# Altium PCB PCB2.PcbDoc
Units mil, origin at the board's own origin, x right, y up, seen from the top; angles counter-clockwise.
Board outline 5905.51 x 3937.01 mil, 2 copper layers (Top Layer, Bottom Layer); 96 components, 87 nets, 320 pads, 16 vias.
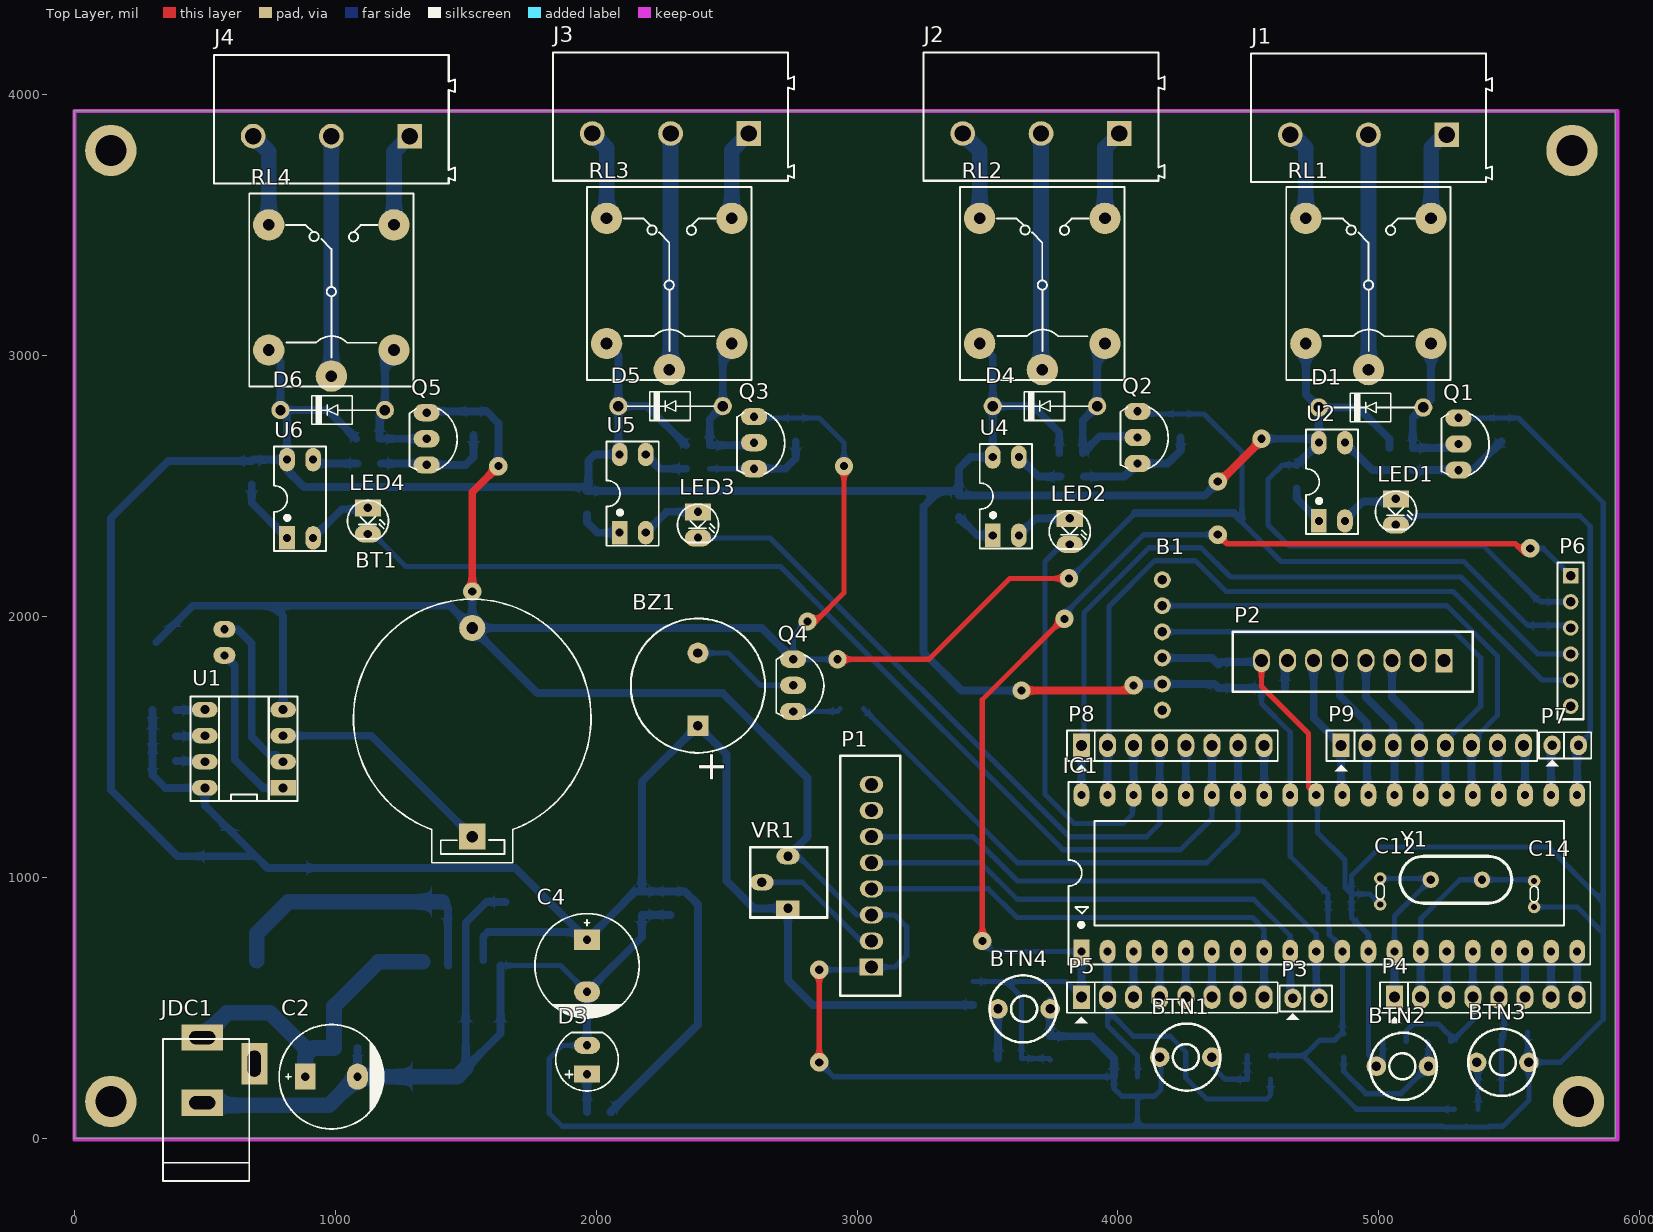
[diagram p0: Top Layer view]
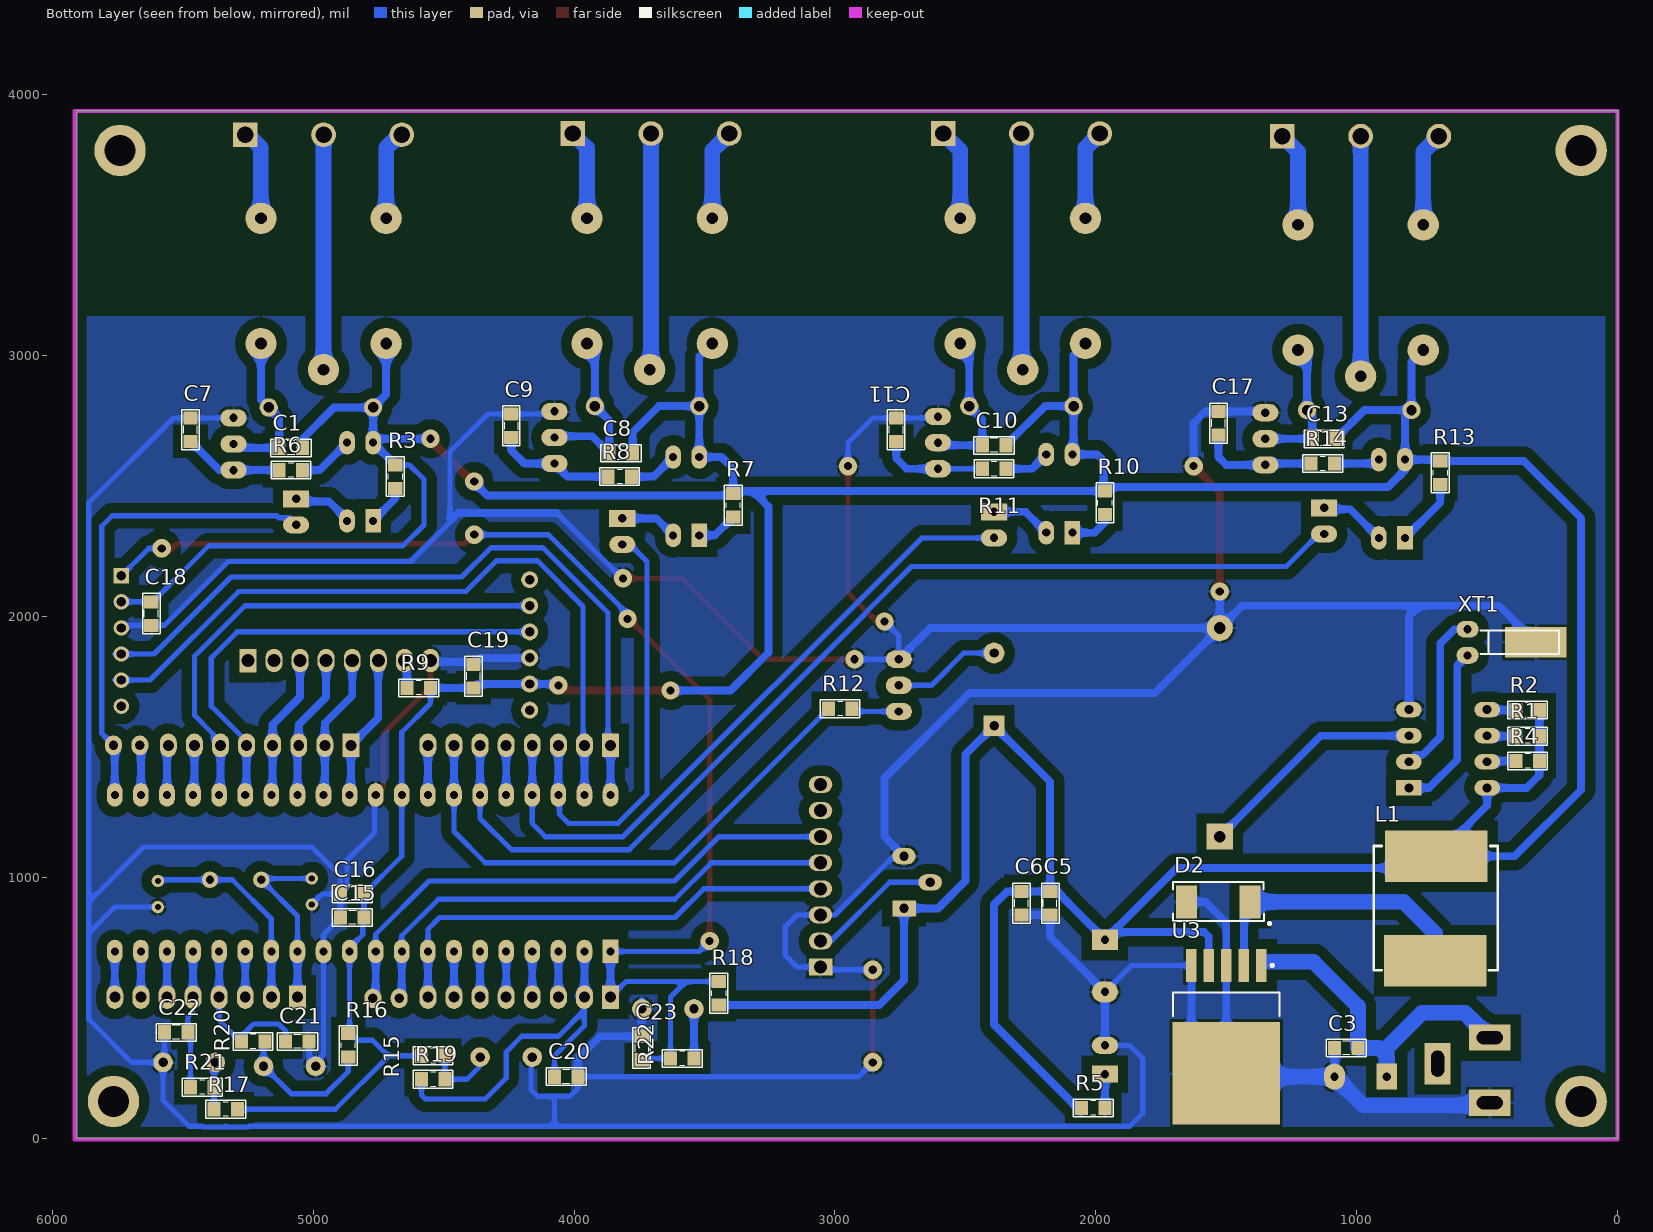
[diagram p1: Bottom Layer view, seen from below]
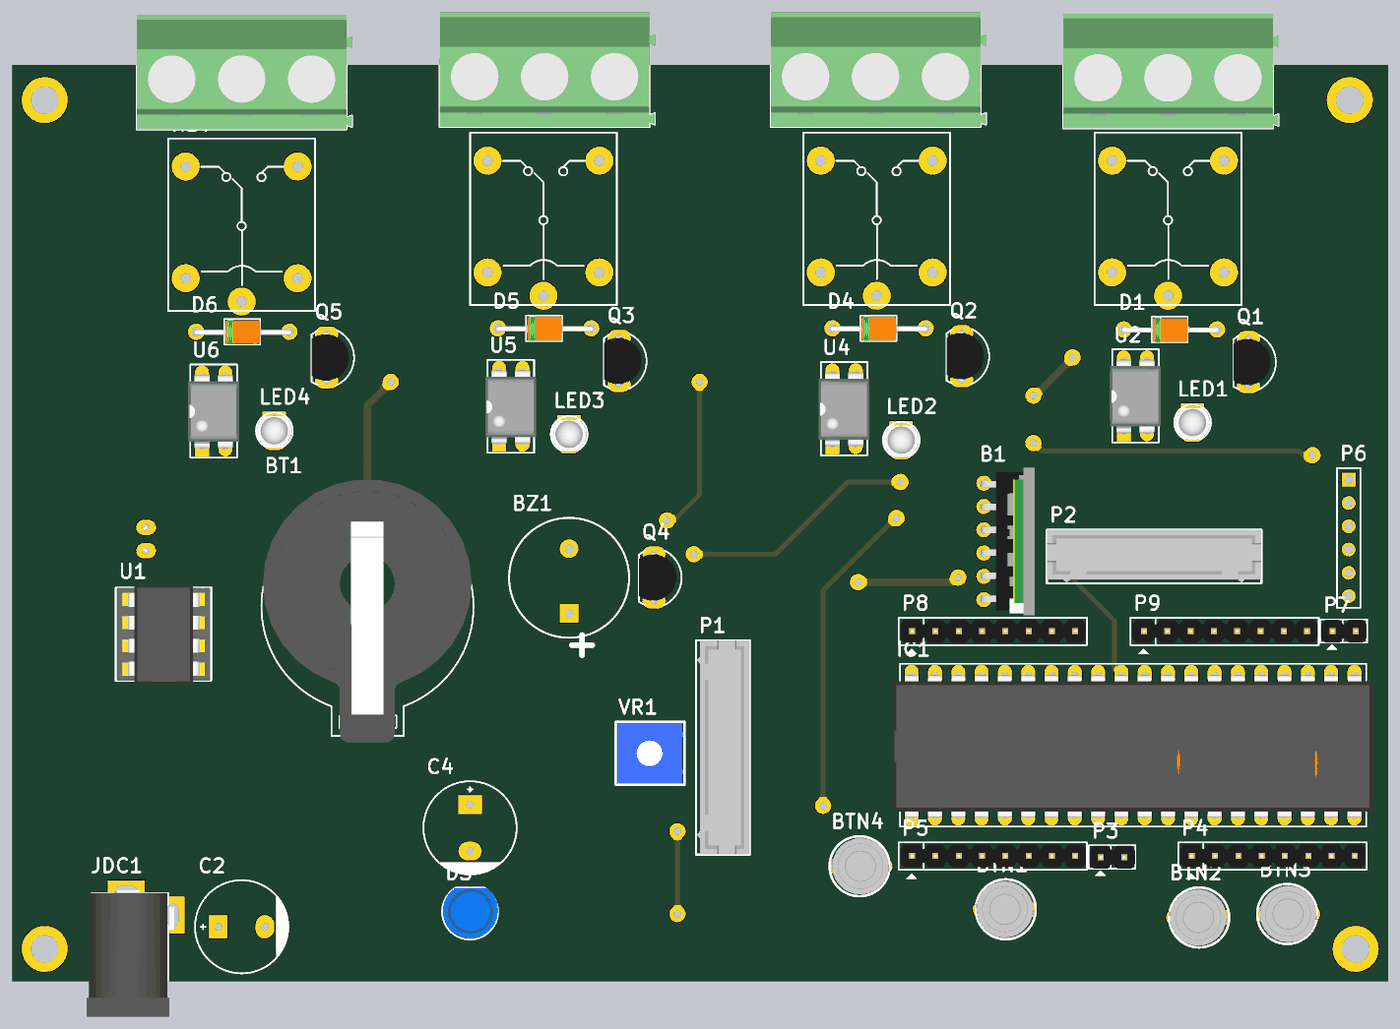
[diagram p2: 3D render of the assembled board from above, using the file's embedded part models]
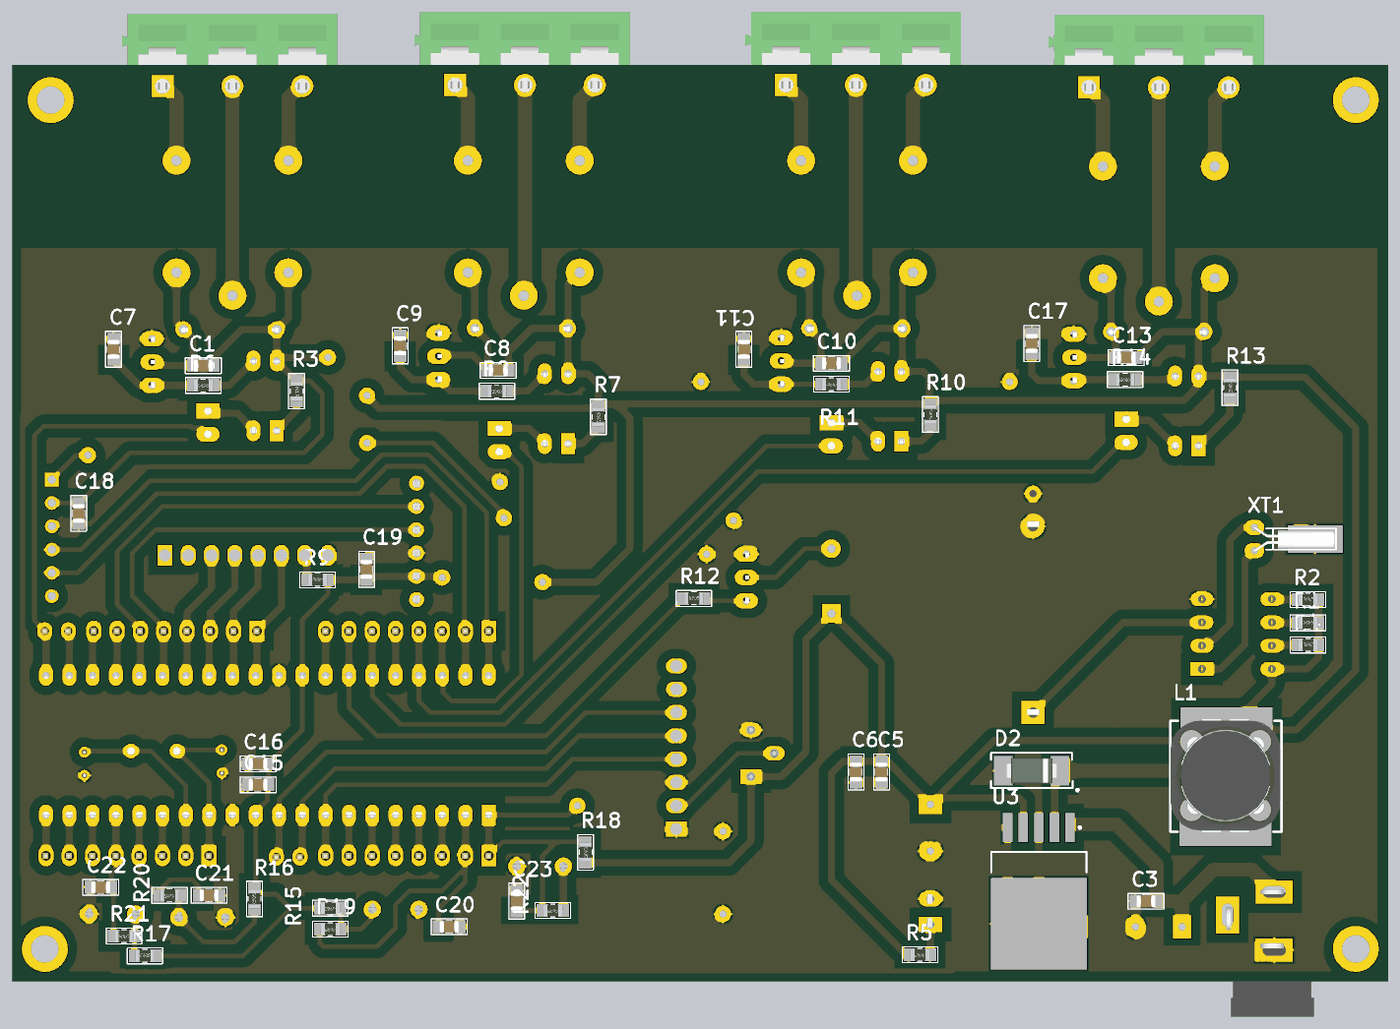
[diagram p3: 3D render of the assembled board from below, using the file's embedded part models]

## Layer stack, top to bottom
Top Solder: solder mask 0.4, Solder Resist, Dk 3.5
Top Layer: signal copper 1.4
Dielectric 1: dielectric 12.6, FR-4, Dk 4.8
Bottom Layer: signal copper 1.4
Bottom Solder: solder mask 0.4, Solder Resist, Dk 3.5

## Board outline
0,0 0,3937.01 5905.51,3937.01 5905.51,0

## Design rules (kind name [scope] priority, off if disabled: settings)
Clearance [All] p1: gap=40 ignorepadtopadclearanceinfootprint=FALSE
PlaneConnect [All] p1: planeconnectstyle=Direct reliefexpansion=20 reliefentries=4 reliefconductorwidth=10 reliefairgap=10
PolygonConnect [All] p1: connectstyle=Relief reliefconductorwidth=10 reliefentries=4 polygonreliefangle="90 Angle" airgapwidth=10
RoutingVias [All] p1: holewidth=31 width=70 viastyle="Through Hole" minholewidth=31 minwidth=70 maxholewidth=31 maxwidth=70
SolderMaskExpansion [All] p1: expansion=4
Width [All] p1: maxlimit=60 minlimit=20 preferedwidth=30
29 further rules are at their usual default settings.

## Components (designator, comment, footprint, x,y, rotation, side; value= is the part's Value field where it differs from the comment)
B1 "HC_05" HC_05 4170,2140 r270 top
BT1 "PIN 3V" PIN3V 1525,1155 r90 top
BTN1 "Button" Button 4260,305 r0 top
BTN2 "Button" Button 5090,270 r0 top
BTN3 "Button" Button 5475,295 r180 top
BTN4 "Button" Button 3640,500 r180 top
BZ1 "Buzzer" BUZZER 2390,1578.73 r90 top
C1 "Cap-10uF-50V-0805" CAP-SM-0805 5130,2645 r180 bottom value=0.1uF/50V
C2 "Cap Pol" CP2/4 885,235 r0 top value=680uF
C3 "Cap-100nF-50V-0805" CAP-SM-0805 1085,345 r180 bottom value=100nF/50V
C4 "Cap Pol" CP2/4 1965,760 r270 top value=220uF
C5 "Cap-100pF-50V-0805" CAP-SM-0805 2175,855 r90 bottom value=100pF/50V
C6 "Cap-100nF-50V-0805" CAP-SM-0805 2285,855 r90 bottom value=100nF/50V
C7 "Cap-10uF-50V-0805" CAP-SM-0805 5470,2760 r270 bottom value=0.1uF/50V
C8 "Cap-10uF-50V-0805" CAP-SM-0805 3865,2625 r180 bottom value=0.1uF/50V
C9 "Cap-10uF-50V-0805" CAP-SM-0805 4240,2775 r270 bottom value=0.1uF/50V
C10 "Cap-10uF-50V-0805" CAP-SM-0805 2435,2655 r180 bottom value=0.1uF/50V
C11 "Cap-10uF-50V-0805" CAP-SM-0805 2765,2760 r270 bottom value=0.1uF/50V
C12 "Capacitor Ceramic" Tu-pico 5005,895 r90 top value=33p
C13 "Cap-10uF-50V-0805" CAP-SM-0805 1170,2680 r180 bottom value=0.1uF/50V
C14 "Capacitor Ceramic" Tu-pico 5595,885 r90 top value=33p
C15 "Cap-10uF-50V-0805" CAP-SM-0805 4895,845 r180 bottom value=0.1uF/50V
C16 "Cap-10uF-50V-0805" CAP-SM-0805 4895,935 r180 bottom value=0.1uF/50V
C17 "Cap-10uF-50V-0805" CAP-SM-0805 1530,2785 r270 bottom value=0.1uF/50V
C18 "Cap-10uF-50V-0805" CAP-SM-0805 5620,1965 r90 bottom value=0.1uF/50V
C19 "Cap-10uF-50V-0805" CAP-SM-0805 4385,1725 r90 bottom value=0.1uF/50V
C20 "Cap-1nF-50V-0805" CAP-SM-0805 3985,235 r0 bottom value=1uF/50V
C21 "Cap-1nF-50V-0805" CAP-SM-0805 5015,370 r0 bottom value=1uF/50V
C22 "Cap-1nF-50V-0805" CAP-SM-0805 5570,405 r180 bottom value=1uF/50V
C23 "Cap-10uF-50V-0805" CAP-SM-0805 3740,390 r270 bottom value=1uF/50V
D1 "Diode" DIO-1A 5170,2800 r180 top value=1N5007
D2 "Diode-SS56" SS56 1530,905 r0 bottom value=SS56
D3 "LED" LED-5mm 1965,300 r90 top
D4 "Diode" DIO-1A 3920,2805 r180 top value=1N5007
D5 "Diode" DIO-1A 2485,2805 r180 top value=1N5007
D6 "Diode" DIO-1A 1190,2790 r180 top value=1N5007
IC1 "PIC 16F877A" DIP40/W0.6 3860,715 r0 top value=PIC16F877A
J1 "691218410003" 691218410003 4960,3909.96 r180 top
J2 "691218410003" 691218410003 3705,3914.96 r180 top
J3 "691218410003" 691218410003 2285,3914.96 r180 top
J4 "691218410003" 691218410003 985,3904.96 r180 top
JDC1 "Jack DC" DC-IN 590,260 r90 top value="Jac DC"
L1 "33uH" Inductor_SMD 458.78,1119.37 r0 bottom value="150 mH"
LED1 "LED" LED-3 5065,2450 r270 top value="LED 3 ly Single Colour"
LED2 "LED" LED-3 3815,2375 r270 top value="LED 3 ly Single Colour"
LED3 "LED" LED-3 2390,2400 r270 top value="LED 3 ly Single Colour"
LED4 "LED" LED-3 1125,2415 r270 top value="LED 3 ly Single Colour"
P1 "header 8p" "header 8p" 3051,652 r180 top
P2 "header 8p" "header 8p" 5253,1826 r270 top
P3 "Header 2" JP2 4670,535 r0 top
P4 "Header 8" JP8 5060,540 r0 top
P5 "Header 8" JP8 3860,540 r0 top
P6 "Header 6" HDR1X6 5735,2155 r270 top
P7 "Header 2" JP2 5664,1505 r0 top
P8 "Header 8" JP8 3860,1505 r0 top
P9 "Header 8" JP8 4855,1505 r0 top
Q1 "C1815" QTO-92 5305,2660 r270 top
Q2 "C1815" QTO-92 4075,2685 r270 top
Q3 "C1815" QTO-92 2605,2665 r270 top
Q4 "Transistor C1815" QTO-92 2755,1735 r270 top
Q5 "C1815" QTO-92 1350,2680 r270 top
R1 "Res-4.7K-0805" RES-SM-0805 390,1540 r180 bottom value=4.7K
R2 "Res-4.7K-0805" RES-SM-0805 390,1640 r180 bottom value=4.7K
R3 "Res-1K-0805" RES-SM-0805 4685,2580 r270 bottom value=1K
R4 "Res-4.7K-0805" RES-SM-0805 390,1445 r180 bottom value=4.7K
R5 "Res-1K-0805" RES-SM-0805 1965,115 r0 bottom value=10K
R6 "Res-1K-0805" RES-SM-0805 5040,2560 r0 bottom value=1K
R7 "Res-1K-0805" RES-SM-0805 3390,2470 r270 bottom value=1K
R8 "Res-1K-0805" RES-SM-0805 3780,2535 r0 bottom value=1K
R9 "Res-1K-0805" RES-SM-0805 4640,1725 r180 bottom value=1K
R10 "Res-1K-0805" RES-SM-0805 1965,2480 r270 bottom value=1K
R11 "Res-1K-0805" RES-SM-0805 2345,2565 r0 bottom value=1K
R12 "Res-15K-0805" RES-SM-0805 3025,1645 r180 bottom value=15K
R13 "Res-1K-0805" RES-SM-0805 680,2595 r270 bottom value=1K
R14 "Res-1K-0805" RES-SM-0805 1085,2585 r0 bottom value=1K
R15 "Res-10k-0805" RES-SM-0805 4495,315 r0 bottom value=10K
R16 "Res-10k-0805" RES-SM-0805 4865,310 r90 bottom value=10K
R17 "Res-10k-0805" RES-SM-0805 5380,110 r180 bottom value=10K
R18 "Res-10k-0805" RES-SM-0805 3445,600 r270 bottom value=10K
R19 "Res-1K-0805" RES-SM-0805 4495,225 r0 bottom value=1K
R20 "Res-1K-0805" RES-SM-0805 5185,370 r0 bottom value=1K
R21 "Res-1K-0805" RES-SM-0805 5380,195 r0 bottom value=1K
R22 "Res-1K-0805" RES-SM-0805 3540,305 r0 bottom value=1K
RL1 "Relay 10A/5V" RL_SPDT_10A 4960,2945 r90 top value="Relay SPDT, 10A, 12V"
RL2 "Relay 10A/12V" RL_SPDT_10A 3710,2945 r90 top value="Relay SPDT, 10A, 12V"
RL3 "Relay 10A/12V" RL_SPDT_10A 2280,2945 r90 top value="Relay SPDT, 10A, 12V"
RL4 "Relay 10A/12V" RL_SPDT_10A 985,2920 r90 top value="Relay SPDT, 10A, 12V"
U1 "DS1307" DIP8 650,1490 r180 top
U2 "PC817" DIP4/W0.3 4770,2365 r0 top
U3 "LM2976" TO-263 1500,425 r270 bottom
U4 "PC817" DIP4/W0.3 3520,2310 r0 top
U5 "PC817" DIP4/W0.3 2090,2320 r0 top
U6 "PC817" DIP4/W0.3 815,2300 r0 top
VR1 "10K" "VRES TOP" 2735,880 r90 top
XT1 "32.768Khz" "CRYSTAL 32.768KHZ" 576,1949 r180 bottom
Y1 "20MHz" XTAL 5295,990 r180 top

## Footprints (in the part's own frame and the unit in brackets; to place one, negate y for a bottom-side part, rotate by r counter-clockwise, add the part's x,y. Pads: shape width x height; smd on the part's side, far side on the other; paste and mask are expansions set on the pad)
691218410003 [mm] "Horizontal Entry Modular with Rising Cage Clamp, pitch 7.62mm, 3pin"
  rect 2.4x2.4 hole 1.6: 1(-7.62,1.65)
  round 2.4 hole 1.6: 2(0,1.65) 3(7.62,1.65)
  silkscreen extent -12.03,-6.25 11.43,6.25, body extent -12.03,-6.25 11.43,6.25, height 21.53
Button [mil] "Button"
  round 75 hole 36: 1(-100,5) 2(100,5)
  silkscreen extent -125,-123 132,133, body extent -127,-117 127,127, height 169
BUZZER [mil] "Buzzer"
  rect 80x80 hole 36: 1(1.27,0)
  round 80 hole 36: 2(280,0)
  silkscreen extent -102,-257 412,257
CAP-SM-0805 [mil]
  rect 50x55 smd: 1(0,0) 2(90,0)
  silkscreen extent -32,-34 122,33, body extent 4,-27 86,27, height 30
CP2/4 [mil] "Tu hoa 1000uF/16V/25V"
  rect 80x100 hole 32: 1(0,0)
  oval 80x100 hole 32: 2(200,0)
  silkscreen extent -100,-200 300,200
"CRYSTAL 32.768KHZ" [mil]
  oval 85x65 hole 31: 1(1,-99) 2(1,1)
  rect 236.22x118.11 smd: 3(262,-49)
  silkscreen extent 51,-94 351,-4, body extent -4,-106 346,6, height 79
DC-IN [mil] "Jac DC input"
  rect 100x160 hole 50 slot 100 at 90 deg: 1(125,100) 2(-125,100)
  rect 160x100 hole 50 slot 100 at 0 deg: 3(25,-100)
  silkscreen extent -425,-80 120,250, body extent -410,-105 134,269, height 434
DIO-1A [mil]
  round 70 hole 40: 1(0,0) 2(400,0)
  silkscreen extent 35,-55 365,55, body extent -11,-50 411,54, height 102
DIP4/W0.3 [mil] "4 PIN, W 300mil, Pin to pin 100mil"
  rect 60x90 hole 31: 1(0,0)
  oval 60x90 hole 31: 2(100,0) 3(100,300) 4(0,300)
  silkscreen extent -50,-50 150,350, body extent -59,-10 159,305, height 170
DIP8 [mm]
  rect 2.5x1.5 hole 0.864: 1(-3.81,3.759)
  oval 2.5x1.5 hole 0.864: 2(-3.81,1.219) 3(-3.81,-1.321) 4(-3.81,-3.861) 5(3.81,-3.861) 6(3.81,-1.321) 7(3.81,1.219) 8(3.81,3.759)
  silkscreen extent -5.21,-5.13 5.21,5.03, body extent -5.08,-5.4 5.08,5.4, height 8.1
DIP40/W0.6 [mil] "40 PIN, W 600mil, Pin to pin 100mil"
  rect 60x90 hole 31: 1(0,0)
  oval 60x90 hole 31: 2(100,0) 3(200,0) 4(300,0) 5(400,0) 6(500,0) 7(600,0) 8(700,0) 9(800,0) 10(900,0) 11(1000,0) 12(1100,0) 13(1200,0) 14(1300,0) 15(1400,0) 16(1500,0) 17(1600,0) 18(1700,0) 19(1800,0) 20(1900,0) 21(1900,600) 22(1800,600) 23(1700,600) 24(1600,600) 25(1500,600) 26(1400,600) 27(1300,600) 28(1200,600) 29(1100,600) 30(1000,600) 31(900,600) 32(800,600) 33(700,600) 34(600,600) 35(500,600) 36(400,600) 37(300,600) 38(200,600) 39(100,600) 40(0,600)
  silkscreen extent -50,-50 1950,650, body extent -82,-10 1982,600, height 224
HC_05 [mil]
  round 65 hole 36: 1(0,0) 2(100,0) 3(200,0) 4(300,0) 5(400,0) 6(500,0)
  body extent -67,-15 567,217, height 1600
HDR1X6 [mm] "Connector; Header; 6 Position"
  rect 1.5x1.5 hole 0.9: 1(0,0)
  round 1.5 hole 0.9: 2(2.54,0) 3(5.08,0) 4(7.62,0) 5(10.16,0) 6(12.7,0)
  silkscreen extent -1.27,-1.27 13.97,1.27, body extent -1.27,-1.27 13.97,1.27, height 7
"header 8p" [mil]
  rect 90x65 hole 50: 1(-4,-3)
  oval 90x65 hole 50: 2(-4,-103) 3(-4,-203) 4(-4,-303) 5(-4,-403) 6(-4,-503) 7(-4,-603) 8(-4,-703)
  silkscreen extent -114,-813 116,107, body extent -114,-813 112,107, height 550
Inductor_SMD [mm]
  rect 10x5 smd: 1(6.096,11.176) 2(6,1)
  silkscreen extent 0,0 12.1,12.1, body extent 0.1,-0.2 12.1,12.14, height 7.15
JP2 [mil]
  oval 65x75 hole 36: 1(0,0) 2(101,0)
  silkscreen extent -50,-81 150,50, body extent -48,-50 148,48, height 323
JP8 [mil] "JP8"
  rect 65x90 hole 42: 1(0,0)
  oval 65x90 hole 42: 2(100,0) 3(200,0) 4(300,0) 5(400,0) 6(500,0) 7(600,0) 8(700,0)
  silkscreen extent -56,-100 752,57, body extent -48,-50 748,48, height 323
LED-3 [mil] "LED 2 PIN, 3ly Only colour"
  rect 65x100 hole 32: 1(0,0)
  oval 65x100 hole 32: 2(100,0)
  silkscreen extent -29,-78 118,79, body extent -13,-75 125,75, height 217
LED-5mm [mil] "LED 2 PIN, 5 ly , Only colour, pin to pin 110mil"
  rect 65x100 hole 32: 1(-55,0)
  oval 65x100 hole 32: 2(55,0)
  silkscreen extent -120,-120 104,120, body extent -113,-120 100,117, height 339
PIN3V [mil] "Socket PIN 3V"
  rect 100x100 hole 45: 1(0,0)
  round 100 hole 45: 2(800,0)
  silkscreen extent -100,-455 910,455, body extent -128,-447 1002,449, height 278
QTO-92 [mil] "TO-92"
  oval 66x100 hole 32: 1(-100,0) 2(0,0) 3(100,0)
  silkscreen extent -117,-65 120,118, body extent -109,-66 109,95, height 245
RES-SM-0805 [mil]
  rect 50x55 smd: 1(0,0) 2(90,0)
  silkscreen extent -31,-34 121,34, body extent -5,-24 95,25, height 20
RL_SPDT_10A [mil] "Relay SPDT, 5 pin, 10A,W 650mil, L 800mil, H 800mil"
  round 120 hole 45: 1(0,0) 2(580,240) 3(580,-240) 4(100,-240) 5(100,240)
  silkscreen extent -40,-315 700,315
SS56 [mil] "DO-214-AC/SMA Molded Diode, Body 5.3x2.6mm, IPC Medium Density"
  rect 80x126 smd: 1(-121,0) 2(122,0)
  silkscreen extent -201,-77 175,88, body extent -108,-55 108,55, height 91
TO-263 [mm]
  rect 3.2x1.05 smd: 1(-6,3.4) 2(-6,1.7) 3(-6,0) 4(-6,-1.7) 5(-6,-3.4)
  rect 10x10.45 smd: 3(4.5,0)
  silkscreen extent -6.12,-5.2 -1.1,5.2, body extent -6.58,-5.2 7.57,5.2, height 4.65
Tu-pico [mm] "Tu gom mini"
  round 1.2 hole 0.6: 1(0,0) 2(2.54,0)
  silkscreen extent 0.51,-0.38 2.03,0.38, body extent -1.65,-0.85 4.19,0.85, height 6.12
"VRES TOP" [mil]
  rect 62x90 hole 36: 1(0,0)
  oval 62x90 hole 36: 2(100,100) 3(200,0)
  silkscreen extent -35,-150 235,145, body extent -30,-146 230,138, height 185
XTAL [mm]
  round 1.6 hole 0.8: 1(-2.552,0.001) 2(2.448,0.001)
  silkscreen extent -5.44,-2.29 5.44,2.29, body extent -5.55,-2.32 5.62,2.35, height 3.63

## Part data
BT1: "Battery 3VDC"
C1 C7 C8 C9 C10 C11 C13 C15 C16 C17 C18 C19 C23: "CAP CER 10UF 50V X5R 0805", Manufacturer=Yageo, Manufacturer Part Number=CC0805KKX5R9BB106, Supplier 1 Part Number=311-3499-2-ND, Local Supplier=thegioiic, Local Supplier Link=https://thegioiic.com/products/tu-10uf-50v-0805, Supplier 1=Digikey, Supplier 1 Link=https://www.digikey.com/product-detail/en/yageo/CC0805KKX5R9BB106/311-3499-2-ND/7164383
C2 C4: library part Cap-TH-Pol, "Polarized Capacitor (Radial)"
C3 C6: "CAP CER 0.1UF 50V Y5V 0805", Manufacturer="Samsung Electro-Mechanics", Manufacturer Part Number=CL21F104ZBCNNNC, Supplier 1 Part Number=1276-1007-1-ND, Local Supplier=thegioiic, Local Supplier Link=https://thegioiic.com/products/tu-100nf-0-1uf-50v-0805, Supplier 1=Digikey, Supplier 1 Link=https://www.digikey.com/product-detail/en/samsung-electro-mechanics/CL21F104ZBCNNNC/1276-1007-1-ND/3889093
C5: "CAP CER 100PF 50V C0G/NP0 0805", Manufacturer=KEMET, Manufacturer Part Number=C0805C101J5GACTU, Supplier 1 Part Number=399-1122-1-ND, Local Supplier=thegioiic, Local Supplier Link=https://thegioiic.com/products/tu-100pf-50v-0805, Supplier 1=Digikey, Supplier 1 Link=https://www.digikey.com/product-detail/en/kemet/C0805C101J5GACTU/399-1122-1-ND/411397
C12 C14: library part CapCeramic, "Capacitor", LatestRevisionDate=17-Jul-2002, LatestRevisionNote="Re-released for DXP Platform.", PackageReference=RAD-0.3, Published=8-Jun-2000, Publisher="Altium Limited"
C20 C21 C22: "CAP CER 1000PF 100V X7R 0805", Manufacturer="Johanson Dielectrics Inc.", Manufacturer Part Number=101X15W102MV4E, Supplier 1 Part Number=709-1335-1-ND, Local Supplier=thegioiic, Local Supplier Link=https://thegioiic.com/products/tu-1nf-50v-0805, Supplier 1=Digikey, Supplier 1 Link=https://www.digikey.com/product-detail/en/johanson-dielectrics-inc/101X15W102MV4E/709-1335-1-ND/2327235
D1 D4 D5 D6: "Default Diode", Code - JEDEC=DO-214-AB, Published=8-Jun-2000, Publisher="Altium Limited", Revision="July-2002: Re-released for DXP Platform."
D2: "5.0A Surface Mount Schottky Rectifier", Supplier 1=thegioiic, Supplier 1 Link=https://thegioiic.com/products/ss56-smb
IC1: library part PIC16F877-PU, "8K FLASH, 368B RAM, 256B EFROM", Copyright by=VanDungEvn
J1 J2 J3 J4: "WR-TBL Serie 2184 Horizontal Entry Modular, Rising Cage Clamp, pitch 7.62mm, 3p", Operating Temperature="-40 to +105degC", Rated Current [UL]=30A, Working Voltage [UL]=300VAC, Application="Rising Cage Clamp", Compliance="Lead free / RoHS", ComponentLink1Description=Manufacturer, ComponentLink1URL=http://www.we-online.de, ComponentLink2Description=Datasheet, ComponentLink2URL=https://katalog.we-online.de/em/datasheet/691218410003.pdf, Modularity=Yes, Mounting Technology=THT, Packaging=Box, Part Number=691218410003, PCB/Cable/Panel=PCB, Pin Number=3, Pitch=7.62mm, Published Date="October 2019", Publisher="Wurth Elektronik", Type=Horizontal
JDC1: "Jack DC input"
L1: library part Inductor, "Inductor"
LED1 LED2 LED3 LED4: "LED Single colour Green and Red"
P3 P7: "Header, 2-Pin", LatestRevisionDate=17-Jul-2002, LatestRevisionNote="Re-released for DXP Platform.", Publisher="Altium Limited"
P4 P5 P8 P9: "Header, 8-Pin", LatestRevisionDate=17-Jul-2002, LatestRevisionNote="Re-released for DXP Platform.", Publisher="Altium Limited"
P6: "Header, 6-Pin", LatestRevisionDate=17-Jul-2002, LatestRevisionNote="Re-released for DXP Platform.", Publisher="Altium Limited"
Q1 Q2 Q3 Q5: "NPN 600mW, ECB", =C2383
Q4: library part C1815
R1 R2 R4: "RES SMD 4.7K OHM 5% 1/8W 0805", Manufacturer=Yageo, Manufacturer Part Number=RC0805JR-074K7L, Supplier 1 Part Number=311-4.7KARCT-ND, Local Supplier=thegioiic, Local Supplier Link=https://thegioiic.com/products/dien-tro-4-7k-ohm-0805-5, Supplier 1=Digikey, Supplier 1 Link=https://www.digikey.com/product-detail/en/yageo/RC0805JR-074K7L/311-4.7KARCT-ND/731274
R3 R5 R6 R7 R8 R9 R10 R11 R13 R14 R19 R20 R21 R22: "RES 1K OHM 1% 1/4W 0805", Manufacturer="Stackpole Electronics Inc", Manufacturer Part Number=RNCP0805FTD1K00, Supplier 1 Part Number=RNCP0805FTD1K00CT-ND, Local Supplier=thegioiic, Local Supplier Link=https://thegioiic.com/products/dien-tro-1k-ohm-0805-5, Supplier 1=Digikey, Supplier 1 Link=https://www.digikey.com/product-detail/en/stackpole-electronics-inc/RNCP0805FTD1K00/RNCP0805FTD1K00CT-ND/2240568
R12: "RES 15K OHM 1% 1/4W 0805", Manufacturer="TE Connectivity Passive Product", Manufacturer Part Number=CRGCQ0805F15K, Supplier 1 Part Number=A129763CT-ND, Local Supplier=thegioiic, Local Supplier Link=https://thegioiic.com/products/dien-tro-15k-ohm-0805-1, Supplier 1=Digikey, Supplier 1 Link=https://www.digikey.com/product-detail/en/te-connectivity-passive-product/CRGCQ0805F15K/A129763CT-ND/8577595
R15 R16 R17 R18: "RES 10K OHM 1% 1/4W 0805", Manufacturer="Stackpole Electronics Inc", Manufacturer Part Number=RNCP0805FTD10K0, Supplier 1 Part Number=RNCP0805FTD10K0CT-ND, Local Supplier=thegioiic, Local Supplier Link=https://thegioiic.com/products/dien-tro-10k-ohm-0805-5, Supplier 1=Digikey, Supplier 1 Link=https://www.digikey.com/product-detail/en/stackpole-electronics-inc/RNCP0805FTD10K0/RNCP0805FTD10K0CT-ND/2240601
RL1 RL2 RL3 RL4: library part "Relay 1", "Relay SPDT,10A - 12VDC 5 Pin", ="Relay SPDT, 10A, 24V"
U2 U4 U5 U6: "Single Opto"
U3: library part LM2596, Max Input Voltage="12 V", Max Output Current="3 (6.0 peak) A", Max Output Voltage=mV, Temperature Range="-40 to +125 degC", Category=IC-Power, Min Input Voltage=mV, Min Output Voltage=mV, Mounting Technology="Surface Mount", Status=Unreleased, Supply Voltage=mV
VR1: library part "Varrible Res"
XT1: library part "Crystal 32.768Khz"
Y1: library part XTAL, "Crystal Oscillator", LatestRevisionDate=17-Jul-2002, LatestRevisionNote="Re-released for DXP Platform.", PackageReference=R38, Published=8-Jun-2000, Publisher="Altium Limited"

## Free pads (board coordinates)
  round 196.85 hole 118.11: 25(140,140) 25(140,3785) 25(5740,3785) 25(5765,140)

## Via types
v1: diameter 70, hole 31, Top Layer to Bottom Layer, 16 vias

## Nets (pads, with @x,y where several pads share a name; then routed paths per layer and width w, separated by ;. In a path a pad name is that pad's centre, name@x,y a point inside that pad or via, vN(x,y) a via of type N, cw(c..) or ccw(c..) an arc to the next point about the centre after c; other vN are vias at no path point)
12V: C2.1 C3.2 JDC1.1 U3.1 | length 1292.7
  Bottom Layer w60: JDC1.1 585,480 750,480 885,345 885,315 ; C2.1 885,315 ; 1335,675 1165.63,675 995,504.37 C3.2 915,345 885,315
AN1: IC1.3 P5.3 | length 175
  Bottom Layer w30: P5.3 IC1.3
AN2: IC1.4 P5.4 | length 175
  Bottom Layer w30: P5.4 IC1.4
AN3: IC1.5 P5.5 | length 175
  Bottom Layer w30: P5.5 IC1.5
AN4: IC1.7 P5.7 | length 175
  Bottom Layer w30: P5.7 IC1.7
BTN1: C20.2 IC1.2 P5.2 R19.2 | length 1447.1
  Bottom Layer w20: P5.2 3960,490 ; C20.2 4075,315 3960,430 3960,490 ; R19.2 4585,165 4570,150 4340,150 4260,230 4260,330 4200,390 4060,390 3960,490
  Bottom Layer w30: P5.2 3965,545 3982.5,545 3960,567.5 IC1.2
BTN2: C21.2 IC1.16 P4.4 R20.2 | length 632.1
  Bottom Layer w20: C21.2 5105,410 5132.5,437.5 5226.57,437.5 5229.07,435 5230,435 5275,390 R20.2 ; R20.2@5285,375 5360,450 P4.4
  Bottom Layer w30: P4.4 IC1.16
BTN3: C22.2 IC1.17 P4.5 R21.2 | length 562.4
  Bottom Layer w20: P4.5 5460,485 5480,465 C22.2@5480,390 ; R21.2@5470,180 5470,395 C22.2
  Bottom Layer w30: P4.5 IC1.17
Buzzer: IC1.34 P8.7 R12.1 | length 2059.1
  Bottom Layer w20: R12.1 3615,1055 4340,1055 4460,1175 IC1.34
  Bottom Layer w30: IC1.34 P8.7
CLKI: C12.2 IC1.13 P4.1 Y1.2 | length 703.1
  Bottom Layer w20: C12.2 5193.58,995 Y1.2 5060,851.36 IC1.13
  Bottom Layer w30: P4.1 IC1.13
CLKO: C14.2 IC1.14 P4.2 Y1.1 | length 799.2
  Bottom Layer w20: IC1.14 5160,840 5309.97,989.97 Y1.1 5590.03,989.97 C14.2
  Bottom Layer w30: P4.2 IC1.14
EN: IC1.10 P1.6 P3.2 | length 2110.4
  Bottom Layer w20: P1.6 3444.29,1155 3614.29,985 4555.93,985 4760,780.93 IC1.10
  Bottom Layer w30: IC1.10 4760,546 P3.2
GND: B1.4 BT1.2 BTN1.1 BTN2.1 BTN3.1 BTN4.1 C2.2 C3.1 C4.2 C5.1 C6.1 C7.1 C9.1 C11.1 C12.1 C14.1 C15.1 C16.1 C17.1 C18.1 C19.2 C20.1 C21.1 C22.1 C23.1 D2.2 D3.2 IC1.12 IC1.31 JDC1.2 P1.1 P1.3 P2.8 P6.3 Q1.1 Q2.1 Q3.1 Q4.1 Q5.1 U1.4 U3.3 U3.5 VR1.3 XT1.3 | length 29643
  Top Layer w20: v1(2810,1980) 2840,1980 2950,2090 v1(2950,2575) ; v1(2855,290) v1(2855,645) ; v1(2925,1835) 3275,1835 3585,2145 v1(3811.78,2145) ; P2.8 4550,1730 4730,1550 4730,1345 IC1.31
  Top Layer w30: v1(1525,2095) 1525,2475 v1(1625,2575)
  Bottom Layer w20: U3.5 1863.78,661.22 C4.2 ; D3.2 1870,355 1820,305 1820,95 1870,45 4075,45 ; Q3.1 2610,2760 C11.1 2855,2760 2950,2665 v1(2950,2575) ; VR1.3 2775,1080 3000,855 P1.3 3145,855 3190,810 3190,699.37 3145.63,655 P1.1 3045,645 v1(2855,645) ; v1(2810,1980) 2755,1925 Q4.1 v1(2925,1835) ; v1(2855,290) 2910,235 C20.1 3985,190 4015,160 4085,160 ; v1(3811.78,2145) 3815,2145 4065,2395 ; Q2.1 4085,2775 C9.1 4330,2775 4475,2630 4475,2375 4475,2360 4625,2210 5325,2210 5570,1965 C18.1 5725,1965 P6.3 ; 4165,270 4165,185 4140,160 4085,160 ; IC1.31 4765,1310 4765,1170 4870,1065 4870,960 C16.1 ; BTN2.1 5015,300 C21.1 ; BTN2.1@4990,290 4960,320 IC1.12 4960,780 C15.1 C16.1 ; C12.1 4965,935 C16.1 ; Q1.1 C7.1 5535,2760 5860,2435 5860,905 ; C22.1 5570,295 BTN3.1 ; C14.1 5760,885 5855,790 5860,790 ; 4075,45 5245.93,45 5248.43,42.5 5331.57,42.5 5334.07,45 5335.93,45 5338.43,42.5 5421.57,42.5 5424.07,45 5475,45 5575,145 BTN3.1 ; 4075,45 4075,150 4085,160 ; C16.1 4895,1005 5005,1115 5650,1115 5860,905 ; BTN3.1 5695,290 5860,455 5860,790 ; 5860,790 5860,905
  Bottom Layer w30: XT1.3 454,2040 760,2040 ; U1.4 800,2000 760,2040 ; C2.2 C3.1 ; Q5.1 1355,2785 C17.1 1580,2785 1625,2740 v1(1625,2575) ; v1(1525,2095) BT1.2 ; U3.5 1633.86,401.69 1500,267.83 1500,661.22 1500,825 1580,905 D2.2 ; D3.2 C4.2 2175,770 C5.1 C6.1 ; VR1.3 2810,1155 2810,1380 2485,1705 1775,1705 BT1.2 ; Q4.1 2635,1955 BT1.2 ; BTN4.1@3740,525 BTN4.1 C23.1 3900,390 3985,305 C20.1 ; 4065,2395 4445,2395 4470,2370 4475,2375 ; B1.4 4360,1840 C19.2 4395,1825 4530,1825 P2.8@4540,1835 ; 760,2040 1440,2040 BT1.2
  Bottom Layer w60: JDC1.2 490,125 975,125 C2.2 1467.17,235 U3.3@1500,267.83
IN1: IC1.21 LED1.2 P7.2 | length 1826.8
  Bottom Layer w20: LED1.2 5092.5,2377.5 5131.57,2377.5 5139.07,2385 5770,2385 5810,2345 5810,1550 P7.2
  Bottom Layer w30: IC1.21 5760,1500 P7.2
IN2: IC1.38 LED2.2 P8.3 | length 1671.4
  Bottom Layer w20: LED2.2@3815,2260 3770,2260 3720,2210 3720,1317.49 3832.49,1205 4020,1205 4056.01,1241.01 4056.01,1271.01 4060,1275 IC1.38
  Bottom Layer w30: IC1.38 P8.3
IN3: IC1.37 LED3.2 P8.4 | length 2565
  Bottom Layer w20: LED3.2 2666.78,2300 3811.78,1155 4110,1155 4160,1205 IC1.37
  Bottom Layer w30: IC1.37 P8.4
IN4: IC1.35 LED4.2 P8.6 | length 4075.6
  Bottom Layer w20: LED4.2@1125,2335 1270,2190 2706.07,2190 2885,2011.07 2885,2008.58 3788.58,1105 4240,1105 4360,1225 IC1.35
  Bottom Layer w30: IC1.35 P8.6
LED1: IC1.30 P2.6 P9.1 | length 569.7
  Bottom Layer w30: P2.6@4740,1835 4750,1825 4750,1610 P9.1 4855,1320 IC1.30
LED2: IC1.29 P2.5 P9.2 | length 569.7
  Bottom Layer w30: P2.5@4840,1835 4850,1825 4850,1695 4955,1590 P9.2 4955,1320 IC1.29
LED3: IC1.28 P2.4 P9.3 | length 569.7
  Bottom Layer w30: P2.4@4940,1835 4950,1825 4950,1690 5055,1585 P9.3 5060,1500 IC1.28
LED4: IC1.27 P2.3 P9.4 | length 569.7
  Bottom Layer w30: P2.3@5040,1835 5050,1825 5050,1690 5155,1585 P9.4 5155,1320 IC1.27
NetBT1_1: BT1.1 U1.3 | length 885.3
  Bottom Layer w30: U1.3 1138.01,1541.99 BT1.1
NetBTN1_2: BTN1.2 R15.1 R19.1 | length 238.6
  Bottom Layer w20: 4365,270 4410,225 R19.1 R15.1
NetBTN2_2: BTN2.2 R16.1 R20.1 | length 577.8
  Bottom Layer w20: R16.1 4865,255 4950,170 5085,170 BTN2.2 BTN2.2@5190,290 ; BTN2.2@5175,290 BTN2.2@5190,290 ; BTN2.2@5185,295 BTN2.2@5190,290 ; R20.1 5190,365 BTN2.2@5190,290
NetBTN3_2: BTN3.2 R17.1 R21.1 | length 167.1
  Bottom Layer w20: BTN3.2 5380,285 R21.1 R21.1@5380,180 ; R17.1 5380,165
NetBTN4_2: BTN4.2 R22.1 | length 190
  Bottom Layer w30: R22.1 BTN4.2
NetBZ1_2: BZ1.2 Q4.2 | length 416.3
  Bottom Layer w20: BZ1.2 2506.27,1858.73 2630,1735 Q4.2
NetC1_1: C1.1 D1.1 Q1.2 RL1.4 | length 610.2
  Bottom Layer w30: RL1.4 5200,2830 D1.1 5130,2760 C1.1 5290,2645 Q1.2
NetC7_2: C7.2 Q1.3 R6.2 | length 385.6
  Bottom Layer w30: R6.2 Q1.3 5360,2560 C7.2
NetC8_1: C8.1 D4.1 Q2.2 RL2.4 | length 694.2
  Bottom Layer w30: RL2.4 3920,3015 D4.1 3865,2750 C8.1 3930,2690 4070,2690 Q2.2
NetC9_2: C9.2 Q2.3 R8.2 | length 461.4
  Bottom Layer w30: R8.2 4025,2535 Q2.3 4190,2585 4240,2635 C9.2
NetC10_1: C10.1 D5.1 Q3.2 RL3.4 | length 599.4
  Bottom Layer w30: RL3.4 2485,3010 D5.1 2435,2755 C10.1 2595,2655 Q3.2
NetC11_2: C11.2 Q3.3 R11.2 | length 411.6
  Bottom Layer w20: R11.2 Q3.3
  Bottom Layer w30: Q3.3 2725,2565 2765,2605 C11.2
NetC13_1: C13.1 D6.1 Q5.2 RL4.4 | length 542.8
  Bottom Layer w30: RL4.4 1190,2985 D6.1 1170,2770 C13.1 Q5.2
NetC17_2: C17.2 Q5.3 R14.2 | length 454.5
  Bottom Layer w30: R14.2 1345,2585 Q5.3 1500,2580 1530,2610 C17.2
NetD2_1: D2.1 L1.1 U3.2 | length 1118.6
  Bottom Layer w30: D2.1 1431.81,882.19 1431.81,662.48 U3.2
  Bottom Layer w60: L1.1 698.78,783.78 820,905 D2.1
NetD3_1: D3.1 R5.1 | length 145
  Bottom Layer w30: R5.1@1965,100 D3.1
NetJ1_1: J1.1 RL1.3 | length 354.9
  Bottom Layer w60: RL1.3 5200,3795.04 J1.1@5260,3855.04
NetJ1_2: J1.2 RL1.1 | length 910
  Bottom Layer w60: RL1.1 J1.2@4960,3855.04
NetJ1_3: J1.3 RL1.2 | length 354.9
  Bottom Layer w60: J1.3@4660,3855.04 4720,3795.04 RL1.2
NetJ2_1: J2.1 RL2.3 | length 347.8
  Bottom Layer w60: RL2.3 3950,3795 J2.1
NetJ2_2: J2.2 RL2.1 | length 907.1
  Bottom Layer w60: J2.2 3705,2950 RL2.1
NetJ2_3: J2.3 RL2.2 | length 351.9
  Bottom Layer w60: J2.3 3470,3785 RL2.2
NetJ3_1: J3.1 RL3.3 | length 351.9
  Bottom Layer w60: RL3.3 2520,3785 J3.1
NetJ3_2: J3.2 RL3.1 | length 907.1
  Bottom Layer w60: RL3.1 2285,2950 J3.2
NetJ3_3: J3.3 RL3.2 | length 347.8
  Bottom Layer w60: J3.3 2040,3795 RL3.2
NetJ4_1: J4.1 RL4.3 | length 364.9
  Bottom Layer w60: RL4.3 1225,3780 J4.1
NetJ4_2: J4.2 RL4.1 | length 920
  Bottom Layer w60: RL4.1 J4.2
NetJ4_3: J4.3 RL4.2 | length 364.9
  Bottom Layer w60: J4.3 745,3780 RL4.2
NetLED1_1: LED1.1 U2.2 | length 233.1
  Bottom Layer w30: U2.2 4870,2370 4940,2440 5055,2440 LED1.1
NetLED2_1: LED2.1 U4.2 | length 228.1
  Bottom Layer w30: U4.2 3685,2375 3800,2375 LED2.1@3815,2360
NetLED3_1: LED3.1 U5.2 | length 233.1
  Bottom Layer w30: U5.2 2270,2400 LED3.1
NetLED4_1: LED4.1 U6.2 | length 265.9
  Bottom Layer w30: U6.2 1025,2410 1100,2410 LED4.1@1125,2435
NetP1_2: P1.2 VR1.2 | length 513.2
  Bottom Layer w20: VR1.2 2790,980 3015,755 P1.2
NetP2_7: P2.7 R9.1 | length 110
  Bottom Layer w30: R9.1 P2.7@4640,1835
NetQ4_3: Q4.3 R12.2 | length 184.1
  Bottom Layer w20: Q4.3 2925,1635 R12.2
NetR1_1: R1.1 U1.6 | length 110.8
  Bottom Layer w30: R1.1 498.01,1540 U1.6
NetR2_1: R2.1 U1.5 | length 110.8
  Bottom Layer w30: R2.1 498.01,1640 U1.5
NetR3_2: R3.2 U2.1 | length 160.2
  Bottom Layer w30: R3.2 4685,2450 U2.1
NetR4_1: R4.1 U1.7 | length 111.2
  Bottom Layer w30: R4.1 496.99,1445 U1.7
NetR6_1: R6.1 U2.3 | length 213.5
  Bottom Layer w30: U2.3 4975,2560 R6.1
NetR7_2: R7.2 U4.1 | length 159
  Bottom Layer w30: R7.2 3460,2310 U4.1
NetR8_1: R8.1 U4.3 | length 191.1
  Bottom Layer w30: U4.3 3695,2535 R8.1
NetR10_2: R10.2 U5.1 | length 171.6
  Bottom Layer w30: R10.2 1965,2360 2005,2320 U5.1
NetR11_1: R11.1 U5.3 | length 177.8
  Bottom Layer w30: U5.3 2245,2565 R11.1
NetR13_2: R13.2 U6.1 | length 260.9
  Bottom Layer w30: R13.2 680,2435 U6.1
NetR14_1: R14.1 U6.3 | length 176.2
  Bottom Layer w30: U6.3 930,2585 R14.1
NetU1_1: U1.1 XT1.1 | length 646.3
  Bottom Layer w30: XT1.1 615,1810 615,1450 723.01,1341.99 U1.1
NetU1_2: U1.2 XT1.2 | length 645.2
  Bottom Layer w30: XT1.2 625,1950 680,1895 680,1536.91 749.44,1467.47 774.53,1467.47 U1.2
PGC: IC1.39 P6.5 P8.2 | length 2781.6
  Bottom Layer w20: P8.2 3965,1510 3965,2037.53 4139.97,2212.5 4297.5,2212.5 4415,2095 5285,2095 5625,1755 P6.5 P6.5@5760,1755
  Bottom Layer w30: IC1.39 P8.2
PGD: IC1.40 P6.4 P8.1 | length 2864.4
  Bottom Layer w20: P8.1 3870,1515 3870,2013.24 4119.26,2262.5 4318.21,2262.5 4430.71,2150 5314.29,2150 5609.29,1855 P6.4 P6.4@5760,1855
  Bottom Layer w30: IC1.40 P8.1
PGM: IC1.36 P8.5 | length 190
  Bottom Layer w30: IC1.36 P8.5
PSP0: IC1.19 P4.7 | length 175
  Bottom Layer w30: P4.7 IC1.19
PSP1: IC1.20 P4.8 | length 175
  Bottom Layer w30: P4.8 IC1.20
PSP3: IC1.22 P7.1 | length 191.7
  Bottom Layer w30: IC1.22 5660,1501 P7.1
RS: IC1.8 P1.4 P5.8 | length 1829.2
  Bottom Layer w20: P1.4 3502.87,955 3612.87,845 4515,845 4560,800 IC1.8
  Bottom Layer w30: P5.8 IC1.8
RW: IC1.9 P1.5 P3.1 | length 1965.1
  Bottom Layer w20: P1.5 3473.58,1055 3613.58,915 4520,915 4660,775 IC1.9
  Bottom Layer w30: IC1.9 4660,545 P3.1
RX: B1.3 IC1.26 P9.5 | length 1790.8
  Bottom Layer w20: B1.3 5290.46,1940 5390,1840.46 5390,1655.03 5282.5,1547.53
  Bottom Layer w30: P9.5 5255,1320 IC1.26
SCL: IC1.18 P4.6 | length 175
  Bottom Layer w30: P4.6 IC1.18
SDA: IC1.23 P9.8 | length 192.1
  Bottom Layer w30: P9.8 5560,1500 IC1.23
SDO: IC1.24 P9.7 | length 192.1
  Bottom Layer w30: P9.7 5455,1320 IC1.24
SQW: IC1.33 P8.8 | length 190
  Bottom Layer w30: IC1.33 P8.8
T0CKI: IC1.6 P5.6 | length 175
  Bottom Layer w30: P5.6 IC1.6
T1OSO: IC1.15 P4.3 | length 175
  Bottom Layer w30: P4.3 IC1.15
TX: B1.2 IC1.25 P9.6 | length 1940
  Bottom Layer w20: B1.2 5261.17,2040 5455,1846.17 5455,1620.03 5382.5,1547.53 5382.5,1532.5 P9.6
  Bottom Layer w30: P9.6 5355,1320 IC1.25
VDD: B1.5 BZ1.1 C1.2 C4.1 C5.2 C6.2 C8.2 C10.2 C13.2 C15.2 C16.2 C18.2 C19.1 D1.2 D4.2 D5.2 D6.2 IC1.11 IC1.32 L1.2 P6.2 R1.2 R2.2 R3.1 R4.2 R5.2 R7.1 R9.2 R10.1 R13.1 R15.2 R16.2 R17.2 R18.2 RL1.5 RL2.5 RL3.5 RL4.5 U1.8 U2.4 U3.4 U4.4 U5.4 U6.4 VR1.1 | length 23196
  Top Layer w30: v1(3630,1715) 4040,1715 v1(4060,1735) ; v1(4382.5,2516.25) 4391.25,2516.25 4550,2675 v1(4550,2680)
  Bottom Layer w20: R5.2@2055,100 R5.2@2060,95 ; R9.2 4550,1665 4660,1555 IC1.32 4660,1080 C16.2 C15.2 4805,815.71 4810,810.71 4810,778.99 4860,728.99 IC1.11 R16.2@4860,405 ; R15.2 4713.36,315 ; R3.1 4630,2580 4575,2525 4575,2350 4655,2270 5400,2270 5610,2060 C18.2@5620,2060 ; R16.2 R16.2@4860,405 ; R17.2 4915,110 4713.36,311.64 4713.36,315 ; C18.2 P6.2 ; 4713.36,315 4773.36,375 4830,375 R16.2@4860,405
  Bottom Layer w30: R2.2 R1.2 R4.2 300,1390 348.01,1341.99 U1.8 500,1275 L1.2 ; RL4.5 790,2975 D6.2 ; C13.2 970,2790 D6.2 ; U3.4@1566.93,681.22 1566.93,771.93 1584.21,789.21 C4.1@1935.79,789.21 ; RL3.5 2085,3000 D5.2 ; R5.2@2055,100 2390,435 2390,895 2340,945 C6.2 C5.2 ; C10.2 2195,2805 D5.2 ; R7.1@3380,2480 3315,2480 ; R18.2 2830,510 2735,605 VR1.1 2605,880 2500,985 2500,1470 BZ1.1 2175,1365 C5.2 ; RL2.5 3520,2995 D4.2 ; v1(3630,1715) 3400,1715 3255,1860 3255,2420 3315,2480 ; C8.2 3775,2705 3675,2805 D4.2 ; v1(4060,1735) 4065,1740 B1.5 4370,1740 C19.1 R9.2 ; v1(4382.5,2516.25) 4382.5,2512.5 4332.5,2462.5 3390,2462.5 R7.1 3390,2565 3435,2610 U4.4 D4.2 ; v1(4550,2680) 4755,2680 U2.4 ; R3.1 U2.4 ; RL1.5 4720,2850 D1.2 ; C1.2 5040,2680 4920,2800 D1.2 ; L1.2 740,1035 1690,1035 C4.1@1935.79,789.21 ; L1.2 395,1080 140,1335 140,2375 360,2595 R13.1 685,2600 U6.4 ; D6.2 815,2765 U6.4 ; U6.4 815,2560 880,2495 1950,2495 R10.1 ; C4.1@1935.79,789.21 C4.1 2102.5,897.5 2102.5,898.64 2148.86,945 C5.2 ; R10.1 1970,2485 1970,2595 1995,2620 U5.4 2085,2625 D5.2 ; R10.1 3315,2480 ; U2.4 D1.2
VPP: C23.2 IC1.1 P5.1 P6.1 R18.1 R22.2 | length 4999.5
  Top Layer w20: v1(3480,755) 3480,1680 3795,1995 v1(3795,1990) ; v1(4382.5,2312.5) 4417.5,2277.5 5522.5,2277.5 5560,2240 v1(5580,2260)
  Bottom Layer w20: R18.1 3570,600 ; v1(3480,755) 3520,715 IC1.1 ; C23.2 3735,305 R22.2 3630,540 3570,600 ; v1(3795,1990) 3795,2000.37 3809.29,2014.66 3805,2018.95 4098.55,2312.5 v1(4382.5,2312.5) v1@4390,2305 ; P5.1 3800,600 3570,600 ; v1(5580,2260) 5630,2260 P6.1
  Bottom Layer w30: P5.1 IC1.1
pads on no net: B1.1 B1.6 JDC1.3 P1.7 P1.8 P2.1 P2.2 P6.6

## Polygon pours and split planes (outlines as drawn)
GND on Bottom Layer "GND_L02_P021" (solid, pour order 21): 0,3150 5915,3150 5915,-5 20,-5 0,15
GND on Bottom Layer "GND_L02_P014" (solid, pour order 14): 0,3290
GND on Bottom Layer "GND_L02_P010" (solid, pour order 10): 445,3125
GND on Bottom Layer "GND_L02_P008" (solid, pour order 8): 555,3205
GND on Bottom Layer "GND_L02_P000" (none, remove dead copper, pour order 0): 0,3940

## Keep-outs
Keep-Out Layer:
  lines w15: 5,-5 0,-5 ; 0,-5 5915,-5 5915,3937.01 0,3937.01 0,-5

## Other copper
Top Layer:
  region: 110,3785
  region: 110,3785

## Text inside footprints (layer, text, board x,y; h text height)
BZ1: Top Overlay "+" at 2490,1358.73 h112.5 r90